# EAGLE board BCNmk2 (EAGLE 6.6.0)
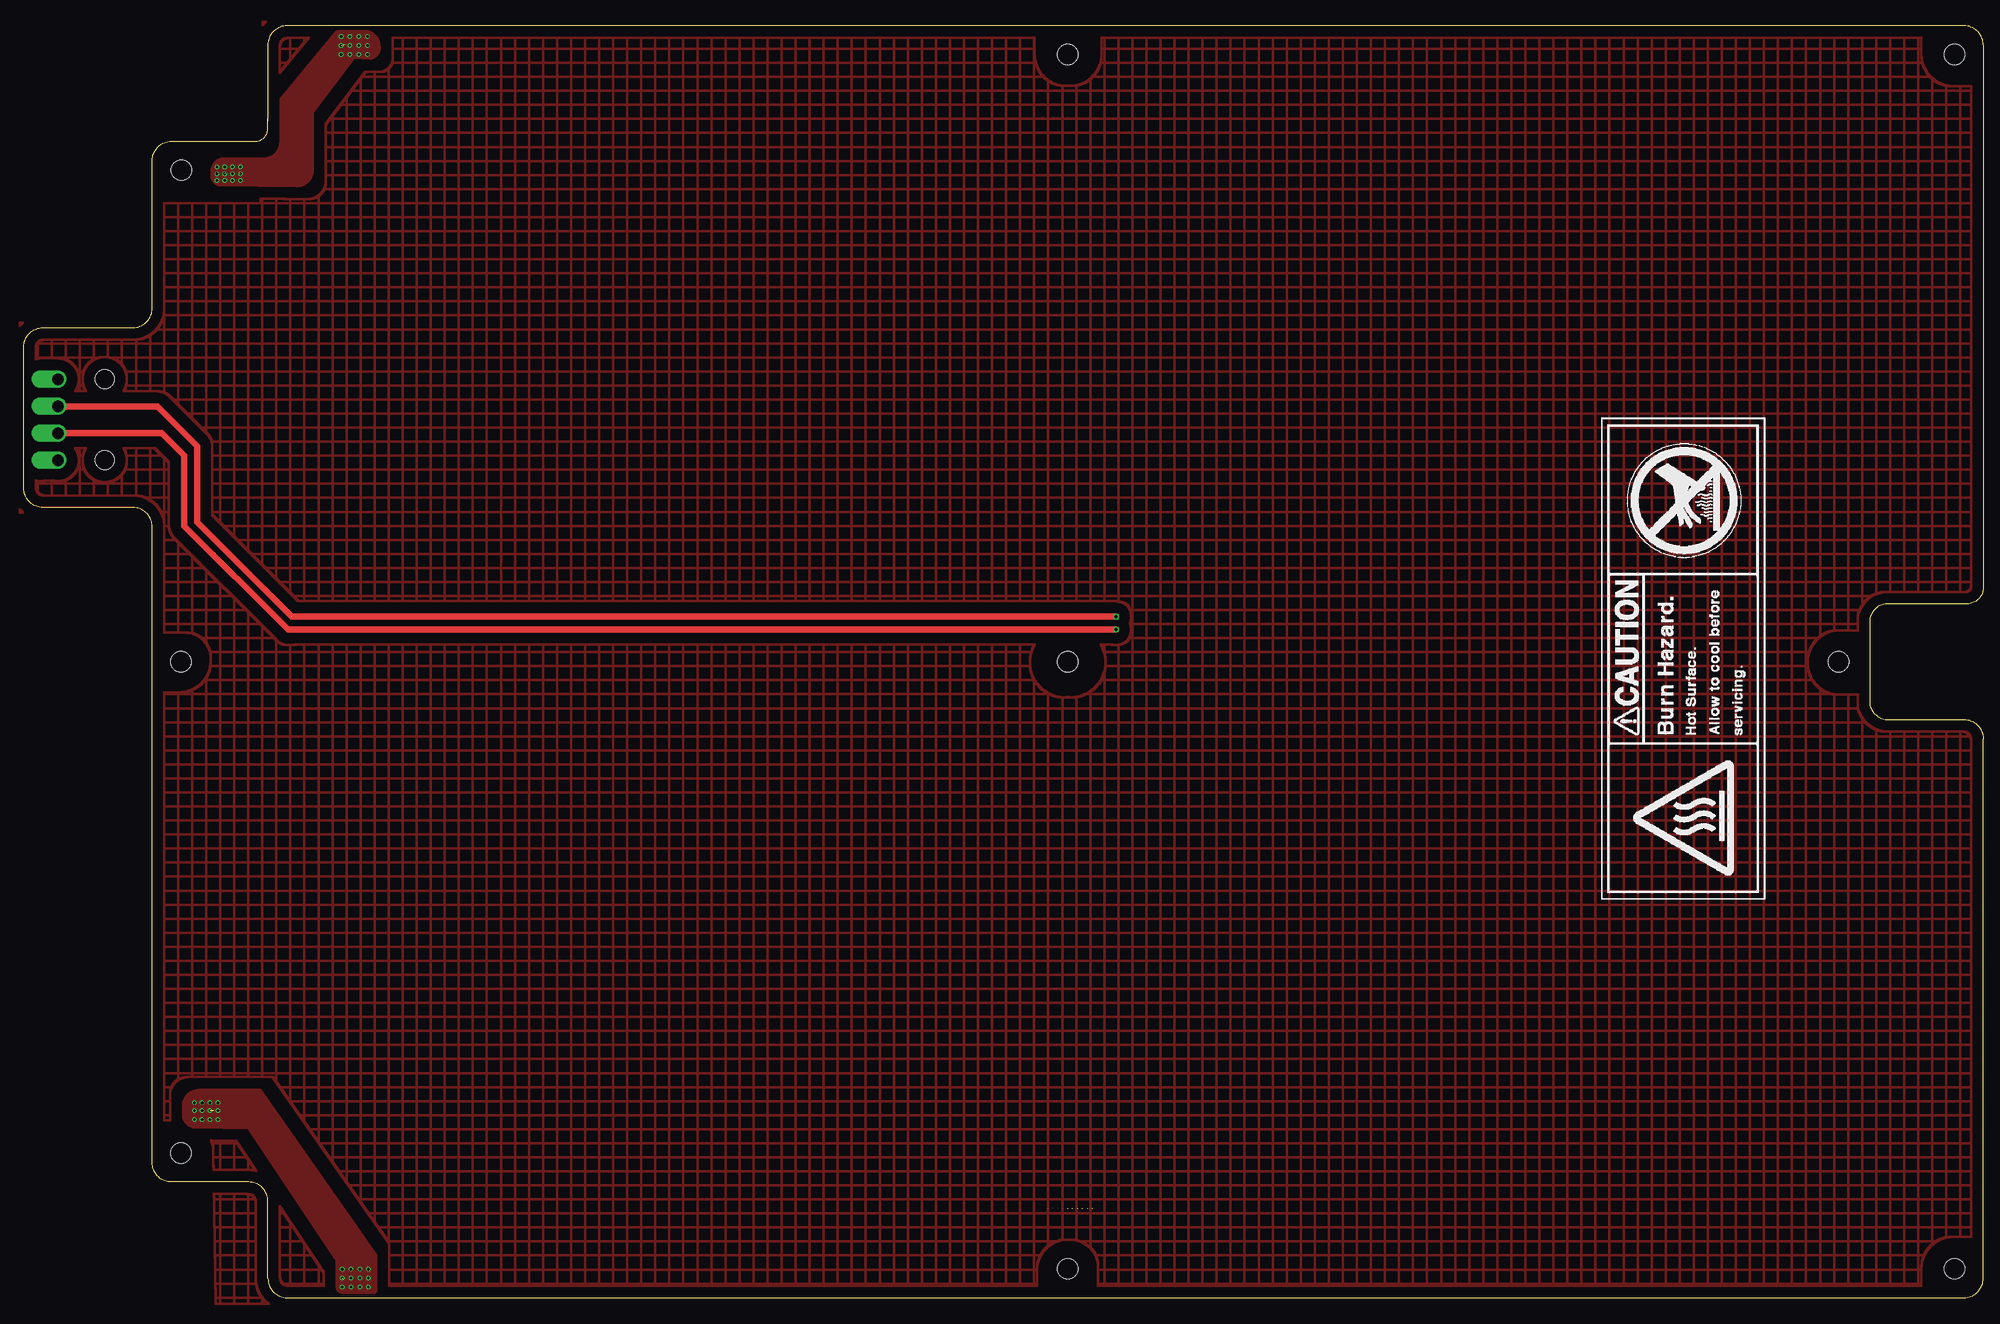
[diagram p0: board, top side]
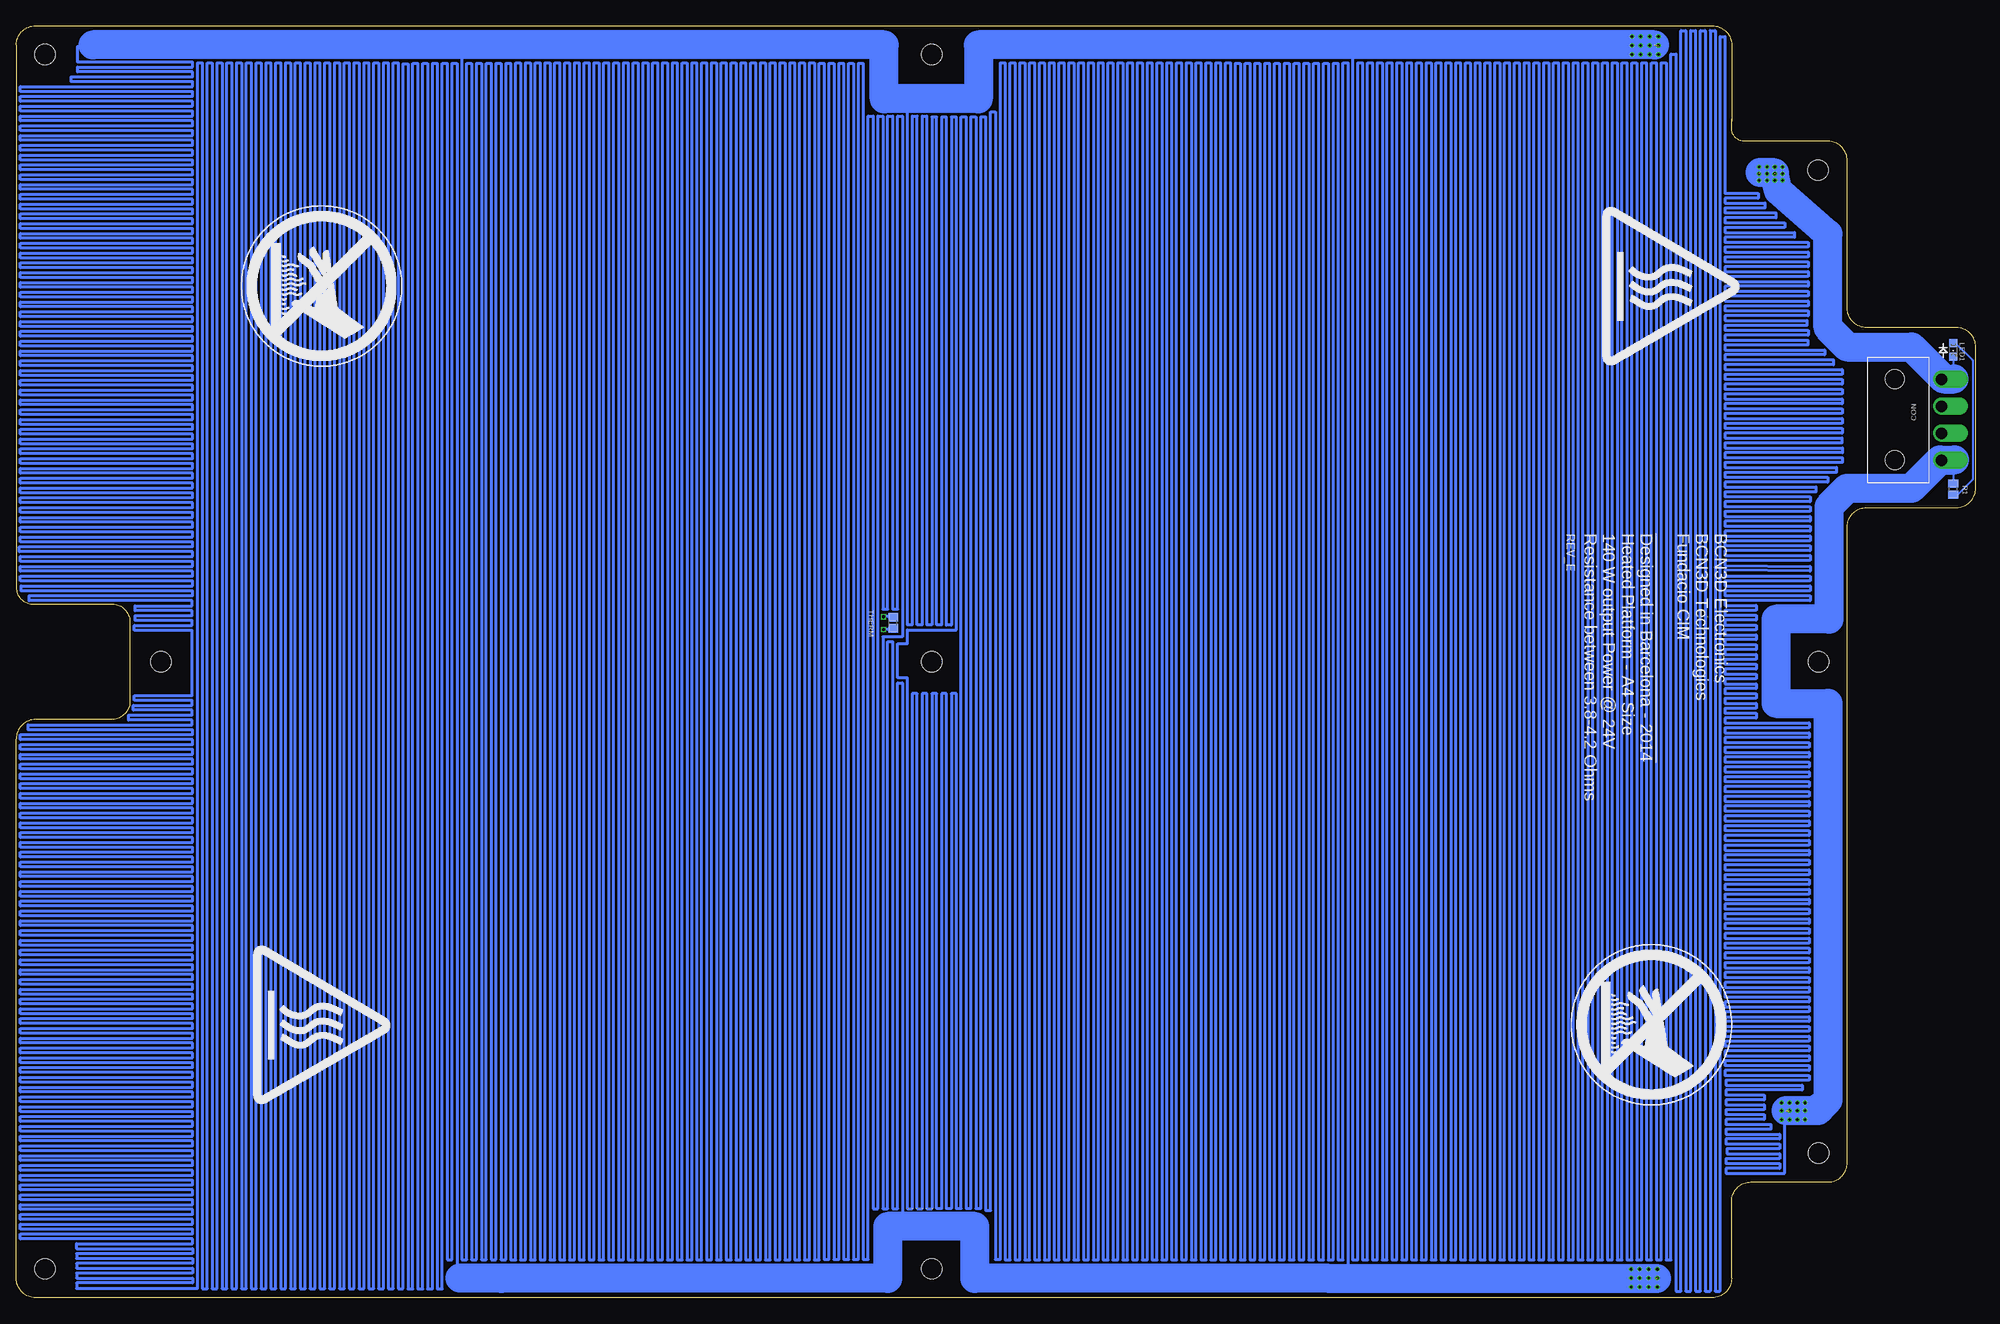
[diagram p1: board, bottom side, seen from below]

Size 305 x 198 mm. Coordinates in mm from the lower left corner, seen from the top.
Outline: 38,3 arc90 41,0 302,0 arc90 305,3 305,87 arc90 302,90 290,90 arc-90 287.31,93 287.31,105 arc-90 290,108 302.5,108 arc90 305,110.5
Outline: 38,3 38,15 arc90 35,18 23,18 arc-90 20,21 20,120 arc90 17,123 3,123 arc-90 0,126 0,148 arc-90 3,151 17,151 arc90 20,154 20,177 arc-90 23,180 36,180 arc90 38,182 38,183.5
Outline: 41,198 arc90 38,195 38,183.1
Outline: 304.99,195 304.99,110.2
Outline: 41,198 302,198 arc-90 305,195
Copper layers (1*16): Top 0.035mm / dielectric 1.5mm / Bottom 0.035mm
Design rules "ITEADstudio_DRC": minimum track width 6mil, minimum drill 12mil, track to track 6mil, track to pad 6mil, pad to pad 6mil, via to via 6mil, smd to smd 0mil, copper to edge 10mil, drill to drill 10mil, minimum pad ring 10mil, minimum via ring 6mil, stop-mask expansion 2mil, vias tented up to drill 100mil, thermal gap 10mil
Holes 3.2 mm at 300.5,193.5 162.5,193.5 24.57,175.51 24.5,22.5 162.5,4.5 300.5,4.5 162.5,99 24.5,99 282.5,99

## Footprints (pad centres in the part's own frame; a part is rotated, then mirrored left to right if it is on the bottom)
R0805 = smd 1.3 x 1.5: 1 -0.85,0; 2 0.85,0
MOLEX_MINIFIT-JR = drill 1.8 offset: 1 -6.1,3.7; 2 -1.9,3.7; 3 2.3,3.7; 4 6.5,3.7 | hole 3: -6.1,-3.6; 6.5,-3.6
CHIPLED_0805 = smd 1.2 x 1.2: A 0,-1.05; C 0,1.05

## Placement (x,y rotation side)
100K-NTC  [R0805]  168.51,105.04 90 bottom
CON  [MOLEX_MINIFIT-JR]  9,136.87 270 bottom
E$3  [CE_BURNT_TAG]  271,62 90 top
E$5  [HOT_LG]  270,55 270 bottom
E$6  [HOT_DONT_TOUCH_LG]  63,55 270 bottom
E$10  [HOT_DONT_TOUCH_LG]  270,170 270 bottom
E$13  [HOT_LG]  60,170 270 bottom
LED1  LED1  [CHIPLED_0805]  3.5,147.53 180 bottom
R1  [R0805]  3.5,125.87 90 bottom

## Library data of the parts
100K-NTC R1 = resistor
CON E$3 = MarcEagleParts
E$5 E$6 E$10 E$13 = mk2i
LED1 = led

## Tracks (layer width: path | path; a pad name or v marks a point on that pad's centre or on a via)
+24V  (via drill 0.41)  (3 unrouted)
  Bottom 4.5: 31.61,175.15 33.61,175.15 | 50,195 155.24,195 155.24,186.63 169.91,186.63 169.91,195 293.09,195 | 31.33,175.06 30.72,172.28 23,165.56 23,151 20,148 10,148 5,143 3.38,143
  other vias: 33.72,173.89 33.72,174.96 33.72,176.02 32.5,176.02 32.5,174.96 32.5,173.89 31.28,173.89 31.28,174.96 31.28,176.02 30.06,176.02 30.06,174.96 30.06,173.89 50.78,193.55 50.78,196.29 52.16,196.29 53.53,196.29 53.53,194.92 52.16,194.92 50.78,194.92 52.16,193.55 53.53,193.55 49.41,193.55 49.41,194.92 49.41,196.29
  pour Top (no thermals): 42.45,172.97 30.41,173.13 arc-90 29.3,175.01 arc-90 30.92,177.39 37.42,177.39 arc90 39.96,179.93 39.96,186.54 48.8,197.21 52.97,197.21 arc-90 55.36,194.97 arc-90 53.93,192.79 51.39,192.94 44.99,184.56 44.99,175.51 arc-90
GND
  pour Top (isolate 1.676, rank 6, no thermals, hatched): -0.59,151.79 19.09,151.79 19.09,170.38 36.92,170.38 37.22,198.58 157.35,198.58 157.35,193.62 arc90 162.35,188.62 162.77,188.62 arc90 167.77,193.62 167.77,198.75 295.35,198.42 295.37,193.89 arc90 300.22,188.6 305.87,188.6 305.9,112.44 arc-90 300.9,107.44 287.53,107.44 287.53,103.89 282.69,103.89 arc89 277.69,98.95 277.69,98.92 arc91 282.69,93.85 287.91,93.85 287.84,91.29 301.21,91.29 arc-90 306.21,86.29 306.17,9.45 300.37,9.45 arc90 295.37,4.47 295.35,-0.76 167.23,-0.91 167.22,4.67 arc90 162.89,8.99 arc90 157.73,4.6 157.73,-0.46 29.91,-1.07 29.53,22.66 arc89 24.53,27.58 18.96,27.58 19.18,93.47 19.18,94.18 24.6,94.25 arc89 29.08,99.55 arc90 25.13,103.5 18.8,103.5 18.8,122.22 -0.59,122.22
  cutout Top (isolate 0.813, no thermals): 157.1,98.85 157.1,98.89 arc-90 162.1,103.89 162.89,103.89 arc-90 167.89,98.89 167.89,98.85 arc-90 162.89,93.85 162.1,93.85 arc-90
HOTBED  (via drill 0.41)  (2 unrouted)
  Bottom 4.5: 49.72,2.96 100.62,2.96 100.66,3 155.78,3 155.78,11.07 169.37,11.07 169.37,3 229.48,3 235.95,3.05 | 3.31,130.4 5.6,130.4 10,126 20,126 22.86,123.14 22.86,105.61 31.09,105.61 31.09,92.51 23.01,92.51 23.01,30.75 24,29.76 | 24.27,29.41 24.57,29.11 29.57,29.11
  Bottom 4.572: 24,29.76 arc-90 24.27,29.41
  other vias: 26.55,30.33 27.77,30.33 28.99,30.33 30.21,30.33 30.21,29.11 30.21,27.74 28.99,29.11 28.99,27.74 27.77,29.11 27.77,27.74 26.55,29.11 26.55,27.74 49.57,4.42 49.57,3.05 49.57,1.68 50.94,4.42 50.94,3.05 50.94,1.68 52.31,1.68 52.31,4.42 53.68,4.42 52.31,3.05 53.68,1.68 53.68,3.05
  pour Top (no thermals): 36.92,32.31 27.26,32.31 arc90 24.72,29.77 24.72,28.3 arc90 27.11,26.52 34.94,26.37 48.3,6.25 48.65,5.89 48.65,1.57 arc90 49.92,0.76 54.54,0.76 arc90 54.9,1.12 54.9,6.55
R1  (1 unrouted)
  Bottom 0.5: 96.96,193.7 96.96,5.87 96.2,5.87 96.2,192.2 95.44,192.2 95.44,5.87 94.68,5.87 94.68,192.2 93.91,192.2 93.91,5.87 93.15,5.87 93.15,192.2 92.39,192.2 92.39,5.87 91.63,5.87 91.63,192.2 90.87,192.2 90.87,5.87 90.1,5.87 90.1,192.2 89.34,192.2 89.34,5.87 88.58,5.87 88.58,192.2 87.82,192.2 87.82,5.87 87.06,5.87 87.06,192.2 86.29,192.2 86.29,5.87 85.53,5.87 85.53,192.2 84.77,192.2 84.77,5.87 84.01,5.87 84.01,192.2 83.25,192.2 83.25,5.87 82.48,5.87 82.48,192.2 81.72,192.2 81.72,5.87 80.96,5.87 80.96,192.2 80.2,192.2 80.2,5.87 79.44,5.87 79.44,192.2 78.67,192.2 78.67,5.87 77.91,5.87 77.91,192.2 77.15,192.2 77.15,5.87 76.39,5.87 76.39,192.2 75.63,192.2 75.63,5.87 74.86,5.87 74.86,192.2 74.1,192.2 74.1,5.87 73.34,5.87 73.34,192.2 72.58,192.2 72.58,5.87 71.82,5.87 71.82,192.2 71.05,192.2 71.05,5.87 70.29,5.87 70.29,192.2 69.53,192.2 69.53,5.87 68.77,5.87 68.77,192.2 68.01,192.2 68.01,5.87 67.24,5.87 67.24,192.2 66.48,192.2 66.48,5.87 65.72,5.87 65.72,192.2 64.96,192.2 64.96,5.87 64.2,5.87 64.2,192.2 63.43,192.2 63.43,5.87 62.67,5.87 62.67,192.2 61.91,192.2 61.91,5.87 61.15,5.87 61.15,192.2 60.39,192.2 60.39,5.87 59.62,5.87 59.62,192.2 58.86,192.2 58.86,5.87 58.1,5.87 58.1,192.2 57.34,192.2 57.34,5.87 56.58,5.87 56.58,192.2 55.81,192.2 55.81,5.87 55.05,5.87 55.05,192.2 54.29,192.2 54.29,5.87 53.53,5.87 53.53,192.2 52.77,192.2 52.77,5.87 52,5.87 52,192.2 51.24,192.2 51.24,5.87 50.48,5.87 50.48,192.2 49.72,192.2 49.72,5.87 48.96,5.87 48.96,192.2 48.19,192.2 48.19,5.87 47.43,5.87 47.43,193.57 46.67,193.57 46.67,0.99 45.91,0.99 45.91,197.23 45.15,197.23 45.15,0.99 44.38,0.99 44.38,197.23 43.62,197.23 43.62,0.99 42.86,0.99 42.86,197.23 42.1,197.23 42.1,0.99 41.34,0.99 41.34,197.23 40.57,197.23 40.57,0.99 39.81,0.99 39.81,196.32 39.05,196.32
  Bottom 0.5: 39.05,196.29 39.05,171.91 33.87,171.91 33.87,171.15 39.05,171.15 39.05,170.38 32.8,170.38 32.8,169.62 39.05,169.62 39.05,168.86 31.12,168.86 31.12,168.1 39.05,168.1 39.05,167.34 29.75,167.34 29.75,166.57 39.05,166.57 39.05,165.81 28.23,165.81 28.23,165.05 39.05,165.05 39.05,164.29 26.1,164.29 26.1,163.53 39.05,163.53 39.05,162.76 26.1,162.76 26.1,162 39.05,162 39.05,161.24 26.1,161.24 26.1,160.48 39.05,160.48 39.05,159.72 26.1,159.72 26.1,158.95 39.05,158.95 39.05,158.19 26.1,158.19 26.1,157.43 39.05,157.43 39.05,156.67 26.1,156.67 26.1,155.91 39.05,155.91 39.05,155.14 26.1,155.14 26.1,154.38 39.05,154.38 39.05,153.62 26.1,153.62 26.1,152.86 39.05,152.86 39.05,152.09 26.29,152.09 26.29,151.33 39.05,151.33 39.05,150.57 26.07,150.57 26.07,149.81 39.05,149.81 39.05,149.05 26.11,149.05 26.11,148.28 39.05,148.28 39.05,147.52 23.52,147.52 23.52,146.76 39.05,146.76 39.05,146 22.15,146 22.15,145.24 39.05,145.24 39.05,144.47 20.78,144.47 20.78,143.71 39.05,143.71 39.05,142.95 20.78,142.95 20.78,142.19 39.05,142.19 39.05,141.43 20.78,141.43 20.78,140.66 39.05,140.66 39.05,139.9 20.78,139.9 20.78,139.14 39.05,139.14 39.05,138.38 20.78,138.38 20.78,137.62 39.05,137.62 39.05,136.85 20.78,136.85 20.78,136.09 39.05,136.09 39.05,135.33 20.78,135.33 20.78,134.57 39.05,134.57 39.05,133.81 20.85,133.81 20.85,133.04 39.05,133.04 39.05,132.28 20.76,132.28 20.76,131.52 39.05,131.52 39.05,130.76 20.76,130.76 20.76,130 39.05,130 39.05,129.24 21.68,129.24 21.68,128.47 39.05,128.47 39.05,127.71 23.05,127.71 23.05,126.95 39.05,126.95 39.05,126.19 24.88,126.19 24.88,125.42 39.05,125.42 39.05,124.66 25.79,124.66 25.79,123.9 39.05,123.9 39.05,123.14 25.79,123.14 25.79,122.38 39.05,122.38 39.05,121.61 25.79,121.61 25.79,120.85 39.05,120.85 39.05,120.09 25.79,120.09 25.79,119.33 39.05,119.33 39.05,118.57 25.79,118.57 25.79,117.81 39.05,117.81 39.05,117.04 25.79,117.04 25.79,116.28 39.05,116.28 39.05,115.52 25.79,115.52 25.79,114.76 39.05,114.76 39.05,114 25.79,113.84 25.79,113.08 39.05,113.23 39.05,112.32 25.79,112.32 25.79,111.56 39.05,111.56 39.05,110.8 25.79,110.8 25.79,110.03 39.05,110.03 39.05,109.27 25.79,109.27 25.79,108.51 39.05,108.51 39.05,107.75 34.17,107.75 34.17,106.98 39.05,106.98 39.05,106.22 34.17,106.22 34.17,105.46 39.05,105.46 39.05,104.7 34.17,104.7 34.17,103.94 39.05,103.94 39.05,103.17 34.17,103.17 34.17,102.41 39.05,102.41 39.05,101.65 34.17,101.65 34.17,100.89 39.05,100.89 39.05,100.13 34.17,100.13 34.17,99.36 39.05,99.36 39.05,98.6 34.17,98.6 34.17,97.84 39.05,97.84 39.05,97.08 34.17,97.08 34.17,96.32 39.05,96.32 39.05,95.56 34.17,95.56 34.17,94.79 39.05,94.79 39.05,94.03 34.17,94.03 34.17,93.27 39.05,93.27 39.05,92.51 34.17,92.51 34.17,91.75 39.05,91.75 39.05,90.98 34.17,90.98 34.17,90.22 39.05,90.22 39.05,89.46 25.94,89.46 25.94,88.7 39.05,88.7 39.05,87.94 25.94,87.94 25.94,87.17 39.05,87.17 39.05,86.41 25.94,86.41 25.94,85.65 39.05,85.65 39.05,84.89 25.94,84.89 25.94,84.12 39.05,84.12 39.05,83.36 25.94,83.36 25.94,82.6 39.05,82.6 39.05,81.84 25.94,81.84 25.94,81.08 39.05,81.08 39.05,80.31 25.94,80.31 25.94,79.55 39.05,79.55 39.05,78.79 25.94,78.79 25.94,78.03 39.05,78.03 39.05,77.27 25.94,77.27 25.94,76.5 39.05,76.5 39.05,75.74 25.94,75.74 25.94,74.98 39.05,74.98 39.05,74.22 25.94,74.22 25.94,73.46 39.05,73.46 39.05,72.69 25.94,72.69 25.94,71.93 39.05,71.93 39.05,71.17 25.94,71.17 25.94,70.41 39.05,70.41 39.05,69.65 25.94,69.65 25.94,68.89 39.05,68.89 39.05,68.12 25.94,68.12 25.94,67.36 39.05,67.36 39.05,66.6 25.94,66.6 25.94,65.84 39.05,65.84 39.05,65.08 25.94,65.08 25.94,64.31 39.05,64.31 39.05,63.55 25.94,63.55 25.94,62.79 39.05,62.79 39.05,62.03 25.94,62.03 25.94,61.27 39.05,61.27 39.05,60.5 25.94,60.5 25.94,59.74 39.05,59.74 39.05,58.98 25.94,58.98 25.94,58.22 39.05,58.22 39.05,57.45 25.94,57.45 25.94,56.69 39.05,56.69 39.05,55.93 25.94,55.93 25.94,55.17 39.05,55.17 39.05,54.41 25.94,54.41 25.94,53.65 39.05,53.65 39.05,52.88 25.94,52.88 25.94,52.12 39.05,52.12 39.05,51.36 25.94,51.36 25.94,50.6 39.05,50.6 39.05,49.84 25.94,49.84 25.94,49.07 39.05,49.07 39.05,48.31 25.94,48.31 25.94,47.55 39.05,47.55 39.05,46.79 25.94,46.79 25.94,46.02 39.05,46.02 39.05,45.26 25.94,45.26 25.94,44.5 39.05,44.5 39.05,43.74 25.94,43.74 25.94,42.98 39.05,42.98 39.05,42.22 25.94,42.22 25.94,41.45 39.05,41.45 39.05,40.69 25.94,40.69 25.94,39.93 39.05,39.93 39.05,39.17 25.94,39.17 25.94,38.41 39.05,38.41 39.05,37.64 25.94,37.64 25.94,36.88 39.05,36.88 39.05,36.12 25.94,36.12 25.94,35.36 39.05,35.36 39.05,34.59 25.94,34.59 25.94,33.83 38.9,33.83 38.9,33.07 27.01,33.07 27.01,32.31 38.9,32.31 38.9,31.55 32.95,31.55 32.95,30.79 38.9,30.79 38.9,30.02 32.95,30.02 32.95,29.26 38.9,29.26 38.9,28.5 32.95,28.5 32.95,27.74 38.9,27.74 38.9,26.98 31.89,26.98 31.89,26.21 38.9,26.21 38.9,25.45 30.52,25.45 30.52,24.69 38.9,24.69 38.9,23.93 30.52,23.93 30.52,23.16 38.74,23.16 38.74,22.4 30.52,22.4 30.52,21.64 38.9,21.64 38.9,20.88 30.52,20.88 30.52,20.12 38.9,20.12 38.9,19.36 29.75,19.36 29.75,27.28
R2  (15 unrouted)
  Bottom 0.5: 97.72,3.56 97.72,192.2 98.49,192.2 98.49,5.88 99.25,5.88 99.25,192.15 100.01,192.15 100.01,5.88 100.77,5.88 100.77,192.15 101.53,192.15 101.53,5.88 102.3,5.88 102.3,192.15 103.06,192.15 103.06,5.88 103.82,5.88 103.82,192.15 104.58,192.15 104.58,5.88 105.34,5.88 105.34,192.15 106.11,192.15 106.11,5.88 106.87,5.88 106.87,192.15 107.63,192.15 107.63,5.88 108.39,5.88 108.39,192.15 109.15,192.15 109.15,5.88 109.92,5.88 109.92,192.15 110.68,192.15 110.68,5.88 111.44,5.88 111.44,192.15 112.2,192.15 112.2,5.88 112.96,5.88 112.96,192.15 113.73,192.15 113.73,5.88 114.49,5.88 114.49,192.15 115.25,192.15 115.25,5.87 116.01,5.87 116.01,192.2 116.77,192.2 116.77,5.87 117.54,5.87 117.54,192.2 118.3,192.2 118.3,5.87 119.06,5.87 119.06,192.2 119.82,192.2 119.82,5.87 120.58,5.87 120.58,192.2 121.35,192.2 121.35,5.87 122.11,5.87 122.11,192.2 122.87,192.2 122.87,5.87 123.63,5.87 123.63,192.2 124.39,192.2 124.39,5.87 125.16,5.87 125.16,192.2 125.92,192.2 125.92,5.87 126.68,5.87 126.68,192.2 127.44,192.2 127.44,5.87 128.2,5.87 128.2,192.2 128.97,192.2 128.97,5.87 129.73,5.87 129.73,192.2 130.49,192.2 130.49,5.87 131.25,5.87 131.25,192.2 132.01,192.2 132.01,5.87 132.78,5.87 132.78,192.2 133.54,192.2 133.54,5.87 134.3,5.87 134.3,192.2 135.06,192.2 135.06,5.87 135.82,5.87 135.82,192.2 136.59,192.2 136.59,5.87 137.35,5.87 137.35,192.2 138.11,192.2 138.11,5.87 138.87,5.87 138.87,192.2 139.63,192.2 139.63,5.87 140.4,5.87 140.4,192.2 141.16,192.2 141.16,5.87 141.92,5.87 141.92,192.2 142.68,192.2 142.68,5.87 143.44,5.87 143.44,192.2 144.21,192.2 144.21,5.87 144.97,5.87 144.97,192.2 145.73,192.2 145.73,5.87 146.49,5.87 146.49,192.2 147.25,192.2 147.25,5.87 148.02,5.87 148.02,192.2 148.78,192.2 148.78,5.87 149.54,5.87 149.54,192.2 150.3,192.2 150.3,5.87 151.06,5.87 151.06,192.2 151.83,192.2 151.83,5.94 152.59,5.94 152.59,184.58 153.35,184.58 153.35,13.56 154.11,13.56 154.11,183.82 154.87,183.82 154.87,13.87 155.64,13.87 155.64,183.82 156.4,183.82 156.4,13.87 157.16,13.87 157.16,183.82 157.92,183.82 157.92,13.87 158.68,13.87 158.68,94.03 159.45,94.03 159.45,13.87
  Bottom 0.5: 160.21,13.87 159.45,13.87 | 160.21,13.94 160.21,94.01 160.97,94.01 160.97,13.94 | 161.73,13.94 161.73,94.01 162.49,94.01 162.49,13.87 | 163.26,13.85 162.49,13.85 | 163.26,13.87 163.26,94.01 164.02,94.01 164.02,13.87 | 164.78,13.85 164.02,13.85 | 164.78,13.87 164.78,94.01 165.54,94.01 165.54,13.87 | 166.46,188.21 166.3,188.21 166.3,104.72 165.54,104.72 165.54,183.95 164.78,183.95 164.78,104.72 164.02,104.72 164.02,183.95 163.26,183.95 163.26,104.72 162.49,104.72 162.49,183.79 | 166.3,13.85 165.54,13.85 | 160.97,183.82 160.21,183.82 | 160.97,183.79 160.97,104.72 161.73,104.72 161.73,183.79 | 162.49,183.82 161.73,183.82 | 166.3,103.96 166.3,103.94 | 166.3,103.94 158.68,103.94 158.68,183.79 | 166.3,13.87 166.3,96.47 167.83,96.47 167.83,101.8 166.3,101.8 166.3,103.94 | 161.73,13.87 160.97,13.87 | 158.68,183.82 159.45,183.82 159.45,104.7 160.21,104.7 160.21,183.79
R3
  Bottom 0.5: 235.65,194.24 235.65,5.92 234.88,5.92 234.88,192.15 234.12,192.15 234.12,5.92 233.36,5.92 233.36,192.15 232.6,192.15 232.6,5.92 231.84,5.92 231.84,192.15 231.07,192.15 231.07,5.92 230.31,5.92 230.31,192.15 229.55,192.15 229.55,5.92 228.79,5.92 228.79,192.15 228.03,192.15 228.03,5.87 227.26,5.87 227.26,192.2 226.5,192.2 226.5,5.87 225.74,5.87 225.74,192.2 224.98,192.2 224.98,5.87 224.22,5.87 224.22,192.2 223.45,192.2 223.45,5.87 222.69,5.87 222.69,192.2 221.93,192.2 221.93,5.87 221.17,5.87 221.17,192.2 220.41,192.2 220.41,5.87 219.64,5.87 219.64,192.2 218.88,192.2 218.88,5.87 218.12,5.87 218.12,192.2 217.36,192.2 217.36,5.87 216.6,5.87 216.6,192.2 215.83,192.2 215.83,5.87 215.07,5.87 215.07,192.2 214.31,192.2 214.31,5.87 213.55,5.87 213.55,192.2 212.79,192.2 212.79,5.87 212.02,5.87 212.02,192.2 211.26,192.2 211.26,5.87 210.5,5.87 210.5,192.2 209.74,192.2 209.74,5.87 208.98,5.87 208.98,192.2 208.21,192.2 208.21,5.87 207.45,5.87 207.45,192.2 206.69,192.2 206.69,5.87 205.93,5.87 205.93,192.2 205.17,192.2 205.17,5.87 204.4,5.87 204.4,192.2 203.64,192.2 203.64,5.87 202.88,5.87 202.88,192.2 202.12,192.2 202.12,5.87 201.36,5.87 201.36,192.2 200.59,192.2 200.59,5.87 199.83,5.87 199.83,192.2 199.07,192.2 199.07,5.87 198.31,5.87 198.31,192.2 197.55,192.2 197.55,5.87 196.78,5.87 196.78,192.2 196.02,192.2 196.02,5.87 195.26,5.87 195.26,192.2 194.5,192.2 194.5,5.87 193.74,5.87 193.74,192.2 192.97,192.2 192.97,5.87 192.21,5.87 192.21,192.2 191.45,192.2 191.45,5.87 190.69,5.87 190.69,192.2 189.93,192.2 189.93,5.87 189.16,5.87 189.16,192.2 188.4,192.2 188.4,5.87 187.64,5.87 187.64,192.2 186.88,192.2 186.88,5.87 186.12,5.87 186.12,192.2 185.35,192.2 185.35,5.87 184.59,5.87 184.59,192.2 183.83,192.2 183.83,5.87 183.07,5.87 183.07,192.2 182.31,192.2 182.31,5.87 181.54,5.87 181.54,192.2 180.78,192.2 180.78,5.88 180.02,5.88 180.02,192.15 179.26,192.15 179.26,5.93 178.5,5.93 178.5,192.15 177.73,192.15 177.73,5.93 176.97,5.93 176.97,192.15 176.21,192.15 176.21,5.93 175.45,5.93 175.45,192.15 174.69,192.15 174.69,5.93 173.92,5.93 173.92,192.15 173.16,192.15 173.16,5.93 172.4,5.93 172.4,183.92 171.64,183.92 171.64,13.85 170.88,13.85 170.88,183.92 170.11,183.92 170.11,107.19 169.35,107.19 169.35,183.92 168.59,183.92 168.59,107.19 167.83,107.19 167.83,183.92 167.07,183.92 167.07,102.87 170.11,102.87 170.11,13.85 169.35,13.85 169.35,102.11 168.59,102.11 168.59,13.85 167.83,13.85 167.83,95.71 167.07,95.71 167.07,11.73
R4
  Bottom 0.5: 236.41,4.32 236.41,192.15 237.17,192.15 237.17,5.92 237.93,5.92 237.93,192.15 238.69,192.15 238.69,1.35 239.46,1.35 239.46,192.15 240.22,192.15 240.22,1.35 240.98,1.35 240.98,192.15 241.74,192.15 241.74,1.35 242.5,1.35 242.5,192.15 243.27,192.15 243.27,1.35 244.03,1.35 244.03,192.05 244.79,192.05 244.79,1.39 245.55,1.39 245.55,192.2 246.31,192.2 246.31,1.39 247.08,1.39 247.08,192.2 247.84,192.2 247.84,1.39 248.6,1.39 248.6,192.2 249.36,192.2 249.36,1.39 250.12,1.39 250.12,192.2 250.89,192.2 250.89,1.39 251.65,1.39 251.65,192.2 252.41,192.2 252.41,1.39 253.17,1.39 253.17,192.2 253.93,192.2 253.93,1.39 254.7,1.39 254.7,192.2 255.46,192.2 255.46,1.39 256.22,1.39 256.22,192.2 256.98,192.2 256.98,1.39 257.74,1.39 257.74,192.2 258.51,192.2 258.51,1.39 259.27,1.39 259.27,192.2 260.03,192.2 260.03,1.39 260.79,1.39 260.79,192.2 261.55,192.2 261.55,1.39 262.32,1.39 262.32,192.2 263.08,192.2 263.08,1.39 263.84,1.39 263.84,192.2 264.6,192.2 264.6,1.39 265.36,1.39 265.36,192.2 266.13,192.2 266.13,1.39 266.89,1.39 266.89,192.2 267.65,192.2 267.65,1.39 268.41,1.39 268.41,192.2 269.17,192.2 269.17,1.39 269.94,1.39 269.94,192.2 270.7,192.2 270.7,1.39 271.46,1.39 271.46,192.2 272.22,192.2 272.22,1.39 272.98,1.39 272.98,192.2 273.75,192.2 273.75,1.39 274.51,1.39 274.51,192.2 275.27,192.2 275.27,1.39 276.03,1.39 276.03,192.2 276.79,192.2 276.79,1.39 295.61,1.39 295.61,2.29 277.56,2.29 277.56,3.05 295.61,3.05 295.61,3.81 277.56,3.81 277.56,4.57 295.61,4.57 295.61,5.33 277.56,5.33 277.56,6.1 295.61,6.1 295.61,6.86 277.56,6.86 277.56,7.62 295.61,7.62 295.61,8.38 277.56,8.38 277.56,9.14 304.38,9.14 304.38,9.91 277.56,9.91 277.56,10.67 304.38,10.67 304.38,11.43 277.56,11.43 277.56,12.19 304.38,12.19 304.38,12.95 277.56,12.95 277.56,13.72 304.38,13.72 304.38,14.48 277.56,14.48 277.56,15.24 304.38,15.24 304.38,16 277.56,16 277.56,16.76 304.38,16.76 304.38,17.53 277.56,17.53 277.56,18.29 304.38,18.29 304.38,19.05 277.56,19.05 277.56,19.81 304.38,19.81 304.38,20.57 277.56,20.57 277.56,21.34 304.38,21.34 304.38,22.1 277.56,22.1 277.56,22.86 304.38,22.86 304.38,23.62 277.56,23.62 277.56,24.38 304.38,24.38 304.38,25.15 277.56,25.15 277.56,25.91 304.38,25.91 304.38,26.67 277.56,26.67 277.56,27.43 304.38,27.43 304.38,28.19 277.56,28.19 277.56,28.96 304.38,28.96 304.38,29.72 277.56,29.72 277.56,30.48 304.38,30.48 304.38,31.24 277.56,31.24 277.56,32 304.38,32 304.38,32.77 277.56,32.77 277.56,33.53 304.38,33.53 304.38,34.29 277.56,34.29 277.56,35.05 304.38,35.05 304.38,35.81 277.56,35.81 277.56,36.58 304.38,36.58 304.38,37.34 277.56,37.34 277.56,38.1 304.38,38.1 304.38,38.86 277.56,38.86 277.56,39.62 304.38,39.62 304.38,40.39 277.56,40.39 277.56,41.15 304.38,41.15 304.38,41.91 277.56,41.91 277.56,42.67 304.38,42.67 304.38,43.43 277.56,43.43 277.56,44.2 304.38,44.2 304.38,44.96 277.56,44.96 277.56,45.72 304.38,45.72 304.38,46.48 277.56,46.48 277.56,47.24 304.38,47.24 304.38,48.01 277.56,48.01 277.56,48.77 304.38,48.77 304.38,49.53 277.56,49.53 277.56,50.29 304.38,50.29 304.38,51.05 277.56,51.05 277.56,51.82 304.38,51.82 304.38,52.58 277.56,52.58 277.56,53.34 304.38,53.34 304.38,54.1 277.56,54.1 277.56,54.86 304.38,54.86 304.38,55.63 277.56,55.63 277.56,56.39 304.38,56.39 304.38,57.15 277.56,57.15 277.56,57.91 304.38,57.91 304.38,58.67 277.56,58.67 277.56,59.44 304.38,59.44 304.38,60.2 277.56,60.2 277.56,60.96 304.38,60.96 304.38,61.72 277.56,61.72 277.56,62.48 304.38,62.48 304.38,63.25 277.56,63.25 277.56,64.01 304.38,64.01 304.38,64.77 277.56,64.77 277.56,65.53 304.38,65.53 304.38,66.29 277.56,66.29 277.56,67.06 304.38,67.06 304.38,67.82 277.56,67.82 277.56,68.58 304.38,68.58 304.38,69.34 277.56,69.34 277.56,70.1 304.38,70.1 304.38,70.87 277.56,70.87 277.56,71.63 304.38,71.63 304.38,72.39 277.56,72.39 277.56,73.15 304.38,73.15 304.38,73.91 277.56,73.91 277.56,74.68 304.38,74.68 304.38,75.44 277.56,75.44 277.56,76.2 304.38,76.2 304.38,76.96 277.56,76.96 277.56,77.72 304.38,77.72 304.38,78.49 277.56,78.49 277.56,79.25 304.38,79.25 304.38,80.01 277.56,80.01 277.56,80.77 304.38,80.77 304.38,81.53 277.56,81.53 277.56,82.3 304.38,82.3 304.38,83.06 277.56,83.06 277.56,83.82 304.38,83.82 304.38,84.58 277.56,84.58 277.56,85.34 304.38,85.34 304.38,86.11 277.56,86.11 277.56,86.87 304.38,86.87 304.38,87.63 277.56,87.63 277.56,88.39 303.16,88.39 303.16,89.15 277.62,89.15 277.62,89.92 287.53,89.92 287.53,90.68 277.62,90.68 277.62,91.44 286.77,91.44 286.77,92.2 277.62,92.2 277.62,92.96 286.64,92.96 286.64,93.73 277.62,93.73 277.62,103.89 286.64,103.89 286.64,104.65 277.62,104.65 277.62,105.41 286.51,105.41 286.51,106.17 277.62,106.17 277.62,106.93 286.51,106.93 286.51,107.7 277.62,107.7 277.62,108.51 303.01,108.51 303.01,109.27 277.56,109.27 277.56,110.03 304.23,110.03 304.23,110.8 277.56,110.8 277.56,111.56 304.38,111.56 304.38,112.32 277.56,112.32 277.56,113.08 304.38,113.08 304.38,113.84 277.56,113.84 277.56,114.61 304.38,114.61 304.38,115.37 277.56,115.37 277.56,116.13 304.53,116.13 304.53,116.89 277.56,116.89 277.56,117.65 304.38,117.65 304.38,118.42 277.56,118.42 277.56,119.18 304.38,119.18 304.38,119.94 277.56,119.94 277.56,120.7 304.38,120.7 304.38,121.46 277.56,121.46 277.56,122.22 304.38,122.22 304.38,122.99 277.56,122.99 277.56,123.75 304.38,123.75 304.38,124.51 277.56,124.51 277.56,125.27 304.38,125.27 304.38,126.03 277.56,126.03 277.56,126.8 304.38,126.8 304.38,127.56 277.56,127.56 277.56,128.32 304.38,128.32 304.38,129.08 277.56,129.08 277.56,129.84 304.38,129.84 304.38,130.61 277.56,130.61 277.56,131.37 304.38,131.37 304.38,132.13 277.56,132.13 277.56,132.89 304.38,132.89 304.38,133.66 277.56,133.66 277.56,134.42 304.38,134.42 304.38,135.18 277.56,135.18 277.56,135.94 304.38,135.94 304.38,136.7 277.56,136.7 277.56,137.47 304.38,137.47 304.38,138.23 277.56,138.23 277.56,138.99 304.38,138.99 304.38,139.75 277.56,139.75 277.56,140.51 304.38,140.51 304.38,141.28 277.56,141.28 277.56,142.04 304.38,142.04 304.38,142.8 277.56,142.8 277.56,143.56 304.38,143.56 304.38,144.32 277.56,144.32 277.56,145.09 304.38,145.09 304.38,145.85 277.56,145.85 277.56,146.61 304.38,146.61 304.38,147.37 277.56,147.37 277.56,148.13 304.38,148.13 304.38,148.9 277.56,148.9 277.56,149.66 304.38,149.66 304.38,150.42 277.56,150.42 277.56,151.18 304.38,151.18 304.38,151.94 277.56,151.94 277.56,152.71 304.38,152.71 304.38,153.47 277.56,153.47 277.56,154.23 304.38,154.23 304.38,154.99 277.56,154.99 277.56,155.75 304.38,155.75 304.38,156.51 277.56,156.51 277.56,157.28 304.38,157.28 304.38,158.04 277.56,158.04 277.56,158.8 304.38,158.8 304.38,159.56 277.56,159.56 277.56,160.32 304.38,160.32 304.38,161.09 277.56,161.09 277.56,161.85 304.38,161.85 304.38,162.61 277.56,162.61 277.56,163.37 304.38,163.37 304.38,164.13 277.56,164.13 277.56,164.9 304.38,164.9 304.38,165.66 277.56,165.66 277.56,166.42 304.38,166.42 304.38,167.18 277.56,167.18 277.56,167.94 304.38,167.94 304.38,168.71 277.56,168.71 277.56,169.47 304.38,169.47 304.38,170.23 277.56,170.23 277.56,170.99 304.38,170.99 304.38,171.75 277.56,171.75 277.56,172.52 304.38,172.52 304.38,173.28 277.56,173.28 277.56,174.04 304.38,174.04 304.38,174.8 277.56,174.8 277.56,175.56 304.38,175.56 304.38,176.33 277.56,176.33 277.56,177.09 304.38,177.09 304.38,177.85 277.56,177.85 277.56,178.61 304.38,178.61 304.38,179.38 277.56,179.38 277.56,180.14 304.38,180.14 304.38,180.9 277.56,180.9 277.56,181.66 304.38,181.66 304.38,182.42 277.56,182.42 277.56,183.19 304.38,183.19 304.38,183.95 277.56,183.95 277.56,184.71 304.38,184.71 304.38,185.47 277.56,185.47 277.56,186.23 304.38,186.23 304.38,187 277.56,187 277.56,187.76 304.38,187.76 304.38,188.52 277.56,188.52 277.56,189.28 296.45,189.28 296.45,190.04 277.56,190.04 277.56,190.81 295.45,190.81 295.45,191.57 277.56,191.57 277.56,192.33 295.45,192.33 295.45,194.77 293.71,194.77
S$1
  Top 1.016: 24.99,131.06 21.49,134.57 5.18,134.57
S$2
  Bottom 0.5: 40.57,113.69 40.57,96.01
S$3
  Bottom 0.305: 3.43,144.65 3.43,146.43
S$4
  Bottom 0.305: 3.17,148.59 0.51,145.92 0.51,127.38 2.92,124.97 3.43,124.97
S$5
  Top 1.016: 26.98,120.85 26.98,132.59 20.88,138.68 5.18,138.68
S$6
  Bottom 0.305: 3.43,127 3.43,129.79
THERM1  (via drill 0.5)  (1 unrouted)
  Top 1.016: v170,104 41.63,104 | 41.64,103.99 41.13,103.99 25,120.12 25,131
  Bottom 0.5: 168,104 v170,104
THERM2  (via drill 0.5)  (1 unrouted)
  Top 1.016: 41.74,105.99 27,120.74 | v170,106 41.8,106
  Bottom 0.5: 168,106 v170,106

## Text on the board
bPlace: BCN3D Electronics / BCN3D Technologies / Fundacio CIM / _______________________ / Designed in Barcelona - 2014 / Heated Platform - A4 Size / 140 W output Power @ 24V / Resistance between 3.8-4.2 Ohms | REV_E | THERM